# Allegro board heapode_carte_V2.brd
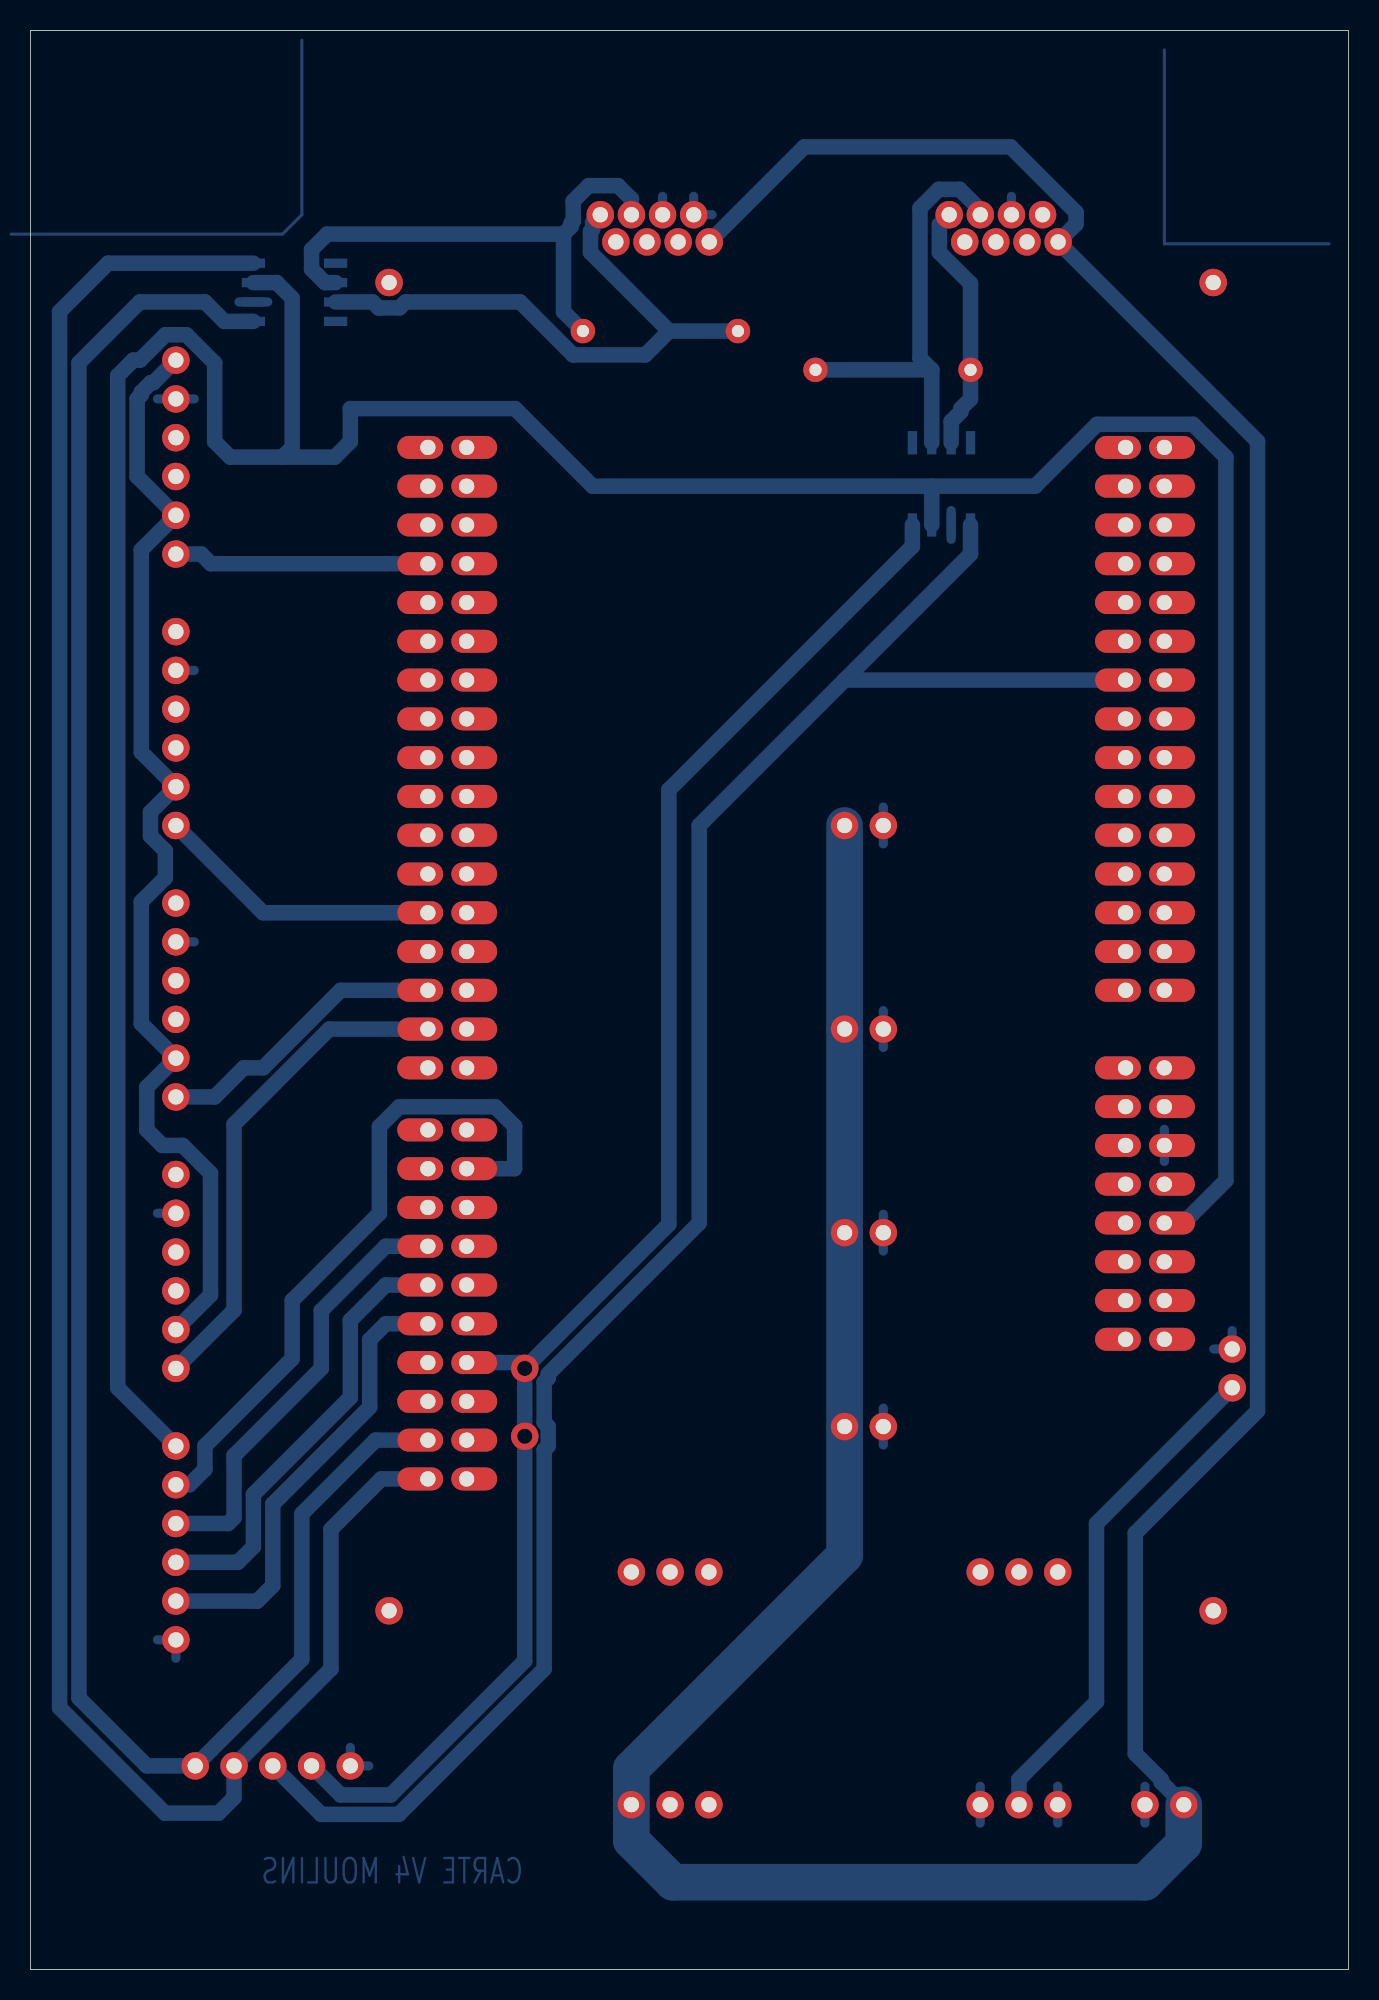
[diagram p0: board, top side]
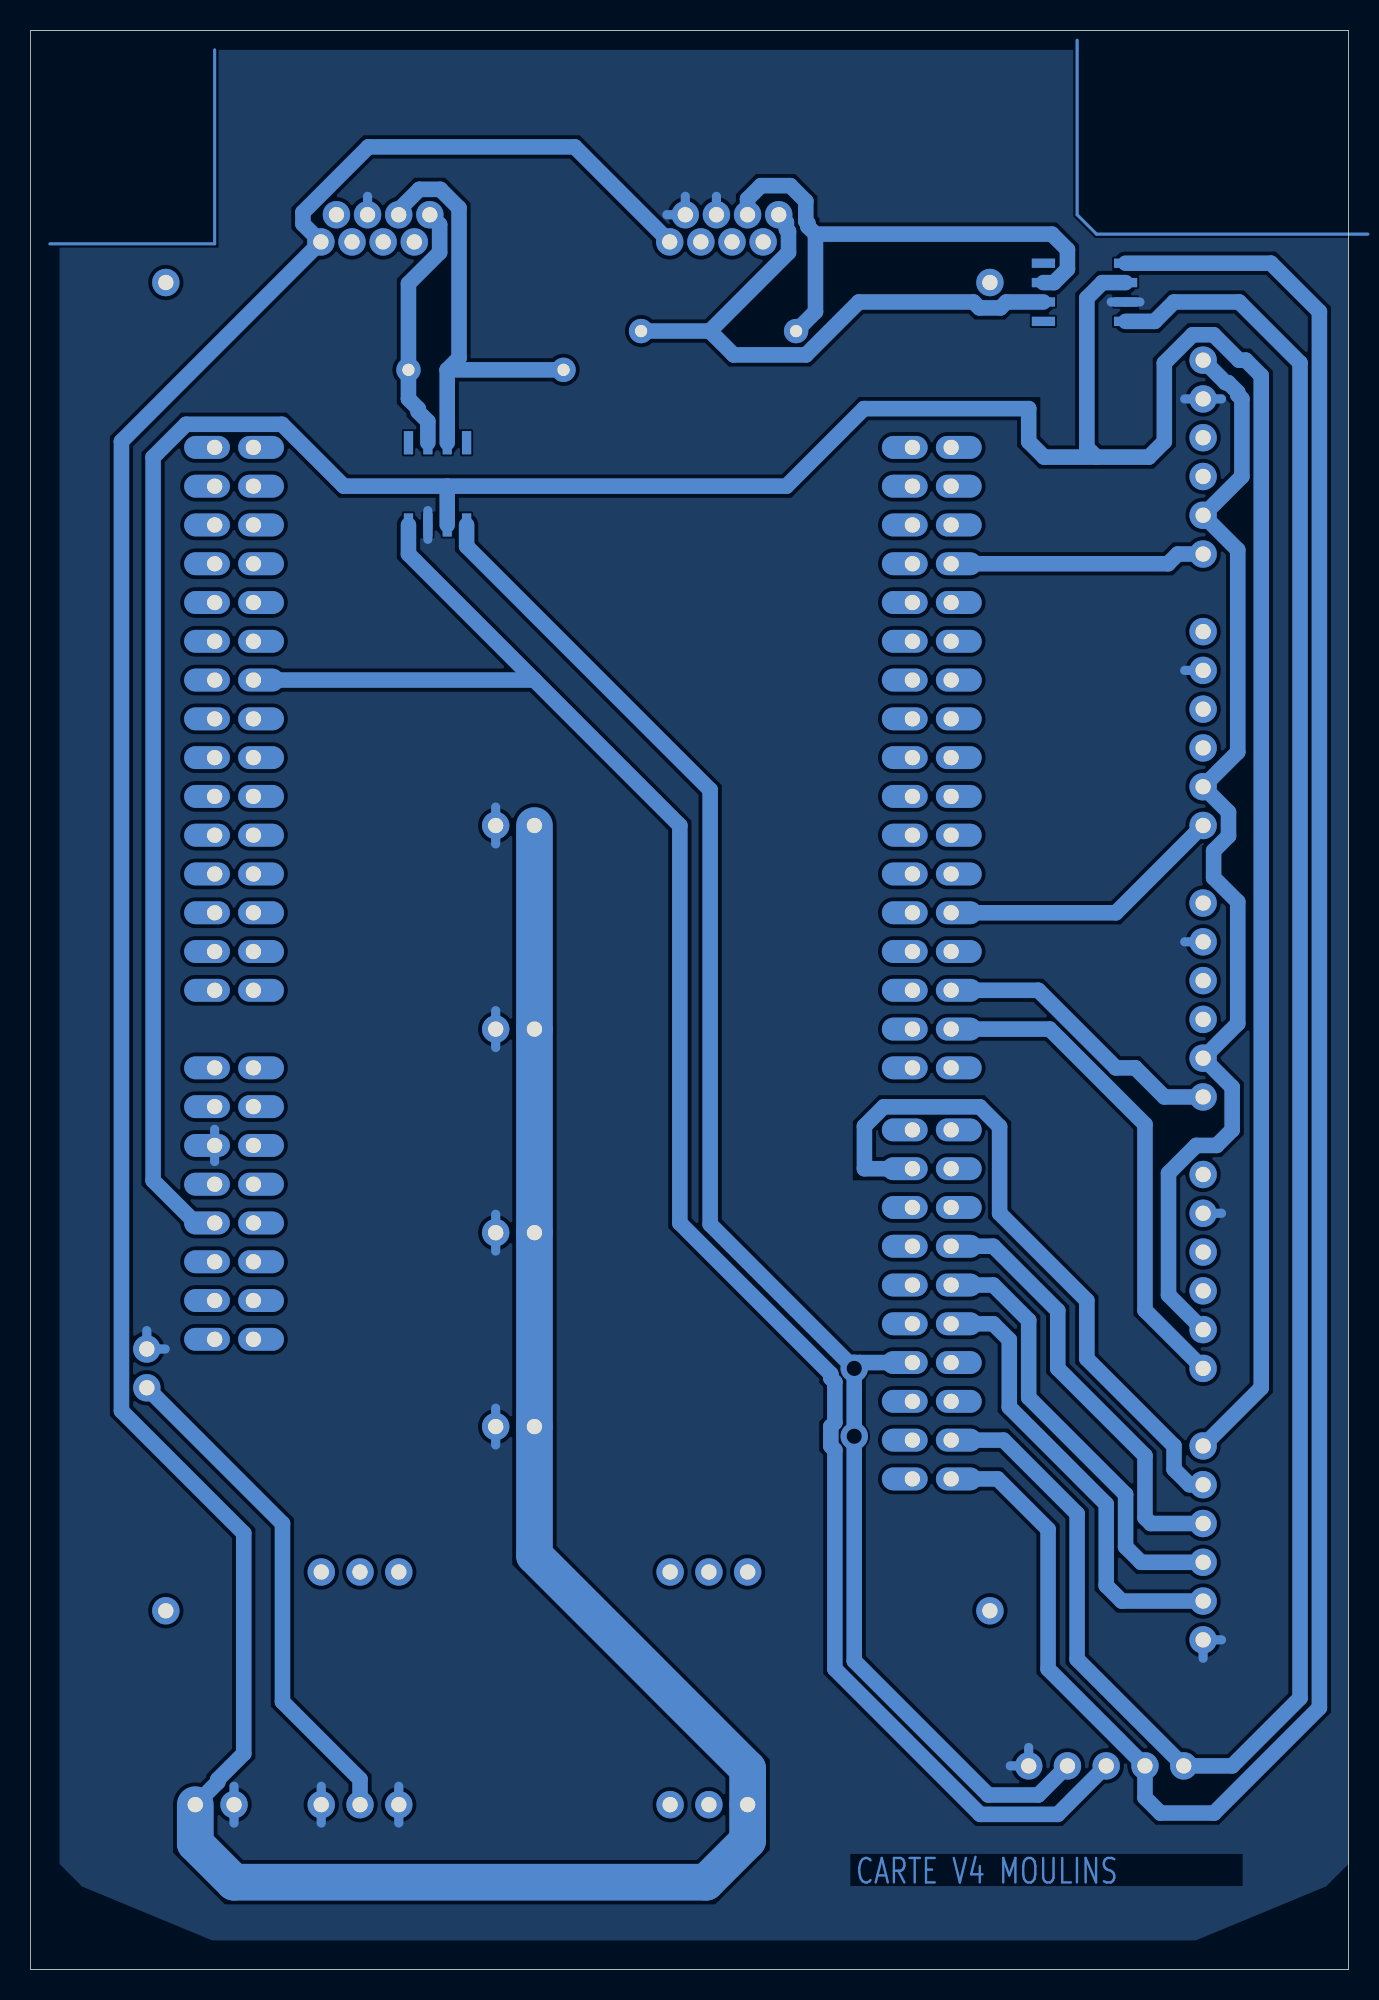
[diagram p1: board, bottom side, seen from below]

Outline 86.36 x 127 mm; copper layers: TOP, BOTTOM. Coordinates in mm from the lower left corner of the outline.
Outline path: 0,127 0,0 86.36,0 86.36,127 0,127

## Design rules (mm)
constraint set DEFAULT: min track width 1.016

## Placement (name value [footprint] x y rotation side)
J11  Sortie_1  [CONNECTEUR_2]  83.19 10.79 180 top
J12  Sortie_2  [CONNECTEUR_2]  45.72 35.56 0 top
J13  Sortie_3  [CONNECTEUR_2]  45.72 48.26 0 top
J14  Sortie_4  [CONNECTEUR_2]  45.72 74.93 0 top
J15  Entree_24V  [CONNECTEUR_2]  45.72 61.59 0 top
J17  Nappe_1  [CONNECTEUR_6]  9.53 34.29 90 top
J18  Nappe_2  [CONNECTEUR_6]  9.53 52.07 90 top
J19  Nappe_3  [CONNECTEUR_6]  9.53 69.85 90 top
J20  Nappe_4  [CONNECTEUR_6]  9.53 87.63 90 top
J23  Lect_Interm_RxTx  [CONNECTEUR_5]  26.04 13.34 180 top
J24  Potar  [CONNECTEUR_6]  9.53 16.51 90 top
J25  Alim_E5V  [CONNECTEUR_2]  78.74 48.26 270 top
R3  120  [RES_01]  36.2 107.31 0 top
R4  120  [RES_01]  51.44 104.78 0 top
U5  sn69hvd232d  [SN65HVD232D]  14.61 107.95 0 bottom
U6  sn69hvd232d  [SN65HVD232D]  61.59 94.61 90 bottom
U7  nucleo_144_shield  [NUCLEO_144_SHIELD]  74.3 99.69 180 top
U8  Conv_TEL_3-2411  [CONV_TRACO]  46.99 41.27 90 top
U9  RJ-45  [RJ45]  5.71 114.94 0 top
U10  RJ-45  [RJ45]  28.57 114.94 0 top
U11  Trou_Drivers  [TROU_DRIVERS]  23.5 23.5 90 top

## Library data of the parts
J11-J15 J25 = CON2
J17-J20 J24 = CON6
J23 = CON5
R3 R4 = R
U5 U6 = sn69hvd232d
U7 = nucleo_144_shield
U8 = Conv_TEL_3-2411
U9 U10 = RJ-45
U11 = Trou_Drivers

## Footprints (pads in the part's own frame, mm; a bottom-side part is the same pattern mirrored in y, then rotated)
CONNECTEUR_2
  round 1.8 hole 1: 1(7.62,0) 2(10.16,0)
CONNECTEUR_5
  round 1.8 hole 1: 1(5.08,0) 2(7.62,0) 3(10.16,0) 4(12.7,0) 5(15.24,0)
CONNECTEUR_6
  round 1.8 hole 1: 1(5.08,0) 2(7.62,0) 3(10.16,0) 4(12.7,0) 5(15.24,0) 6(17.78,0)
CONV_TRACO
  round 1.8 hole 1: 1(-30.48,7.62) 2(-30.48,5.08) 3(-30.48,2.54) 4(-15.24,7.62) 5(-15.24,5.08) 6(-15.24,2.54) 7(-30.48,-15.24) 8(-30.48,-17.78) 9(-30.48,-20.32) 10(-15.24,-15.24) 11(-15.24,-17.78) 12(-15.24,-20.32)
NUCLEO_144_SHIELD
  oval 3x1.5 hole 1: 1(0,58.42) 2(2.54,58.42) 3(0,55.88) 4(2.54,55.88) 5(0,53.34) 6(2.54,53.34) 7(0,50.8) 8(2.54,50.8) 9(0,48.26) 10(2.54,48.26) 11(0,45.72) 12(2.54,45.72) 13(0,43.18) 14(2.54,43.18) 15(0,40.64) 16(2.54,40.64) 17(0,35.56) 18(2.54,35.56) 19(0,33.02) 20(2.54,33.02) 21(0,30.48) 22(2.54,30.48) 23(0,27.94) 24(2.54,27.94) 25(0,25.4) 26(2.54,25.4) 27(0,22.86) 28(2.54,22.86) 29(0,20.32) 30(2.54,20.32) 31(0,17.78) 32(2.54,17.78) 33(0,15.24) 34(2.54,15.24) 35(0,12.7) 36(2.54,12.7) 37(0,10.16) 38(2.54,10.16) 39(0,7.62) 40(2.54,7.62) 41(0,5.08) 42(2.54,5.08) 43(0,2.54) 44(2.54,2.54) 45(0,0) 46(2.54,0) 47(45.72,67.564) 48(48.26,67.564) 49(45.72,65.024) 50(48.26,65.024) 51(45.72,62.484) 52(48.26,62.484) 53(45.72,59.944) 54(48.26,59.944) 55(45.72,57.404) 56(48.26,57.404) 57(45.72,54.864) 58(48.26,54.864) 59(45.72,52.324) 60(48.26,52.324) 61(45.72,49.784) 62(48.26,49.784) 63(45.72,47.244) 64(48.26,47.244) 65(45.72,44.704) 66(48.26,44.704) 67(45.72,40.64) 68(48.26,40.64) 69(45.72,38.1) 70(48.26,38.1) 71(45.72,35.56) 72(48.26,35.56) 73(45.72,33.02) 74(48.26,33.02) 75(45.72,30.48) 76(48.26,30.48) 77(45.72,27.94) 78(48.26,27.94) 79(45.72,25.4) 80(48.26,25.4) 81(45.72,22.86) 82(48.26,22.86) 83(45.72,20.32) 84(48.26,20.32) 85(45.72,17.78) 86(48.26,17.78) 87(45.72,15.24) 88(48.26,15.24) 89(45.72,12.7) 90(48.26,12.7) 91(45.72,10.16) 92(48.26,10.16) 93(45.72,7.62) 94(48.26,7.62) 95(45.72,5.08) 96(48.26,5.08) 97(45.72,2.54) 98(48.26,2.54) 99(45.72,0) 100(48.26,0)
RES_01
  round 1.6 hole 0.8: 1(0,0) 2(10.16,0)
RJ45
  round 1.8 hole 1: 1(31.62,0) 2(33.66,0) 3(35.7,0) 4(37.74,0) 5(32.64,-1.78) 6(34.68,-1.78) 7(36.72,-1.78) 8(38.76,-1.78)
SN65HVD232D
  rect 1.524x0.61 smd: 1(0,0) 2(0,-1.27) 3(0,-2.54) 4(0,-3.81) 5(5.385,-3.81) 6(5.385,-2.54) 7(5.385,-1.27) 8(5.385,0)
TROU_DRIVERS
  round 1.8 hole 1: 1(0,0) 2(87,0) 3(0,-54) 4(87,-54)

## Nets
24V_ALIM: J11.1 J12.1 J13.1 J14.1 J15.1 U8.1 U9.8(PIN_8) U10.8(PIN_8)
+3V3: J24.6 U5.3(VCC) U6.3(VCC) U7.7
+5V: U7.9
VIN_5V: J25.2 U8.8
0: J11.2 J12.2 J13.2 J14.2 J15.2 J17.5 J18.5 J19.5 J20.5 J23.1 J24.1 J25.1 U5.2 U6.2 U7.11 U8.7 U8.9 U9.3 U9.4 U10.3 U10.4
CAN1_H: R3.2 U5.7 U9.1
CAN1_L: R3.1 U5.6 U9.2
CAN1RX_PB8: J23.4 U5.4 U7.48
CAN1TX_PB9: J23.5 U5.1 U7.50
CAN2_H: R4.2 U6.7 U10.1
CAN2_L: R4.1 U6.6 U10.2
CAN2RX_PB12: J23.2 U6.4 U7.53
CAN2TX_PB6: U7.92
CAN2TX_PB13: J23.3 U6.1
CH1_PE9: J17.1 U7.70(PE9)
CH2_PE11: J18.1 U7.72
CH3_PE13: J19.1 U7.76
CH4_PE14: J20.1 U7.94
PA4: J24.5 U7.63
PA5: J24.2 U7.56
PA6: J24.3 U7.58
PA7: J24.4 U7.60
N37105: J17.2 J18.2 J19.2 J20.2 J20.6
N67760: U7.30

Pads without a net: J17 3 4 6; J18 3 4 6; J19 3 4 6; J20 3 4; U5 5 8; U6 5 8; U7 1 2 3 4 5 6 8 10 12 13 14 15 16 17 18 19 20 21 22 23 24 25 26 27 28 29 31 32 33 34 35 36 37 38 39 40 41 42 43 44 45 46 47 49 51 52 54 55 57 59 61 62 64 65 66 67 68 69 71 73 74 75 77 78 79 80 81 82 83 84 85 86 87 88 89 90 91 93 95 96 97 98 99 100; U8 2 3 4 5 6 10 11 12; U9 5 6 7; U10 5 6 7; U11 1 2 3 4

## Via types
v1: diameter 1.8, hole 1, TOP to BOTTOM, 2 vias

## Routing (per net, layer and track width the routed paths; a pad name or vN(x,y) marks a point on that pad's centre or on a via; arc(x,y) is an arc through that point)
24V_ALIM: length 256.4
  BOTTOM w1.016: J11.1 74.09,12.27 74.09,12.44 72.39,14.14 72.39,28.57 80.4,36.59 80.4,100.09 U10.8 68.51,114.33 68.51,115.09 64.22,119.38 50.7,119.38 44.48,113.16
  BOTTOM w2.4: J11.1 75.56,8.26 73.03,5.71 42.1,5.71 39.37,8.44 39.37,13.15 53.34,27.12 J12.1 J13.1 J15.1 J14.1
+3V3: length 227.7
  BOTTOM w1.016: 16.51,99.06 19.94,99.06 20.95,100.08 20.95,102.23 31.75,102.23 36.83,97.16 59.05,97.16 ; 16.51,99.06 13.08,99.06 12.06,100.08 12.06,105.22 10.21,107.07 8.84,107.07 7.17,105.41 6.73,105.41 5.71,104.39 5.71,38.1 9.53,34.29 ; 16.51,99.06 17.14,99.69 17.14,109.47 16.13,110.49 U5.3 ; 59.05,97.16 U6.3 ; 59.05,97.16 65.83,97.16 69.88,101.21 76.17,101.21 78.33,99.05 78.33,51.68 75.55,48.9 74.3,48.9
VIN_5V: length 33.1
  BOTTOM w1.016: J25.2 69.85,29.21 69.85,17.54 64.77,12.46 64.77,10.79
0: length 40.8
  BOTTOM w0.6: 74.3,55.03 74.3,52.92 ; 73.03,12 J11.2 73.03,9.59 ; 78.74,41.85 J25.1 77.53,40.64 ; 62.23,9.59 62.23,12 ; 20.95,14.54 J23.1 22.16,13.34 ; 55.88,49.47 J13.2 55.88,47.05 ; 13.66,109.22 U5.2 15.54,109.22 ; 60.33,95.56 U6.2 60.33,93.67 ; 10.73,102.87 8.32,102.87 ; 9.53,20.38 J24.1 8.32,21.59 ; 67.31,9.59 67.31,12 ; U9.3 41.41,116.14 ; 55.88,34.35 J12.2 55.88,36.77 ; 9.53,85.09 10.73,85.09 ; 44.66,114.94 U9.4 43.45,116.14 ; 55.88,73.72 J14.2 55.88,76.14 ; 55.88,60.39 J15.2 55.88,62.8 ; U10.3 64.28,116.14 ; 8.32,49.53 9.53,49.53 ; 9.53,67.31 10.73,67.31
CAN1_H: length 38.8
  BOTTOM w1.016: 41.84,107.31 36.69,112.47 36.69,113.84 36.83,113.98 36.83,114.43 U9.1 ; 41.84,107.31 40.28,105.75 35.55,105.75 32.08,109.22 24.57,109.22 24.18,108.83 22.81,108.83 22.42,109.22 U5.7 ; 41.84,107.31 R3.2
CAN1_L: length 35.1
  BOTTOM w1.016: 34.92,113.67 34.92,108.58 R3.1 ; 34.92,113.67 35.42,114.16 35.42,114.37 35.56,114.51 35.56,115.82 36.58,116.84 38.5,116.84 39.38,115.96 U9.2 ; 34.92,113.67 19.43,113.67 18.41,112.65 18.41,111.37 19.3,110.49 U5.6
CAN1RX_PB8: length 148.1
  BOTTOM w1.016: 26.04,32.13 22.99,32.13 19.68,28.83 19.68,19.68 J23.4 13.34,11.26 12.32,10.24 8.81,10.24 1.91,17.14 1.91,108.58 5.08,111.76 U5.4
CAN1TX_PB9: length 140.2
  BOTTOM w1.016: U5.1 12.7,107.95 11.43,109.22 7.16,109.22 3.17,105.23 3.17,17.78 7.62,13.34 J23.5 17.78,20.32 17.78,29.84 22.61,34.67 26.04,34.67
CAN2_H: length 16.6
  BOTTOM w1.016: U10.1 59.55,114.29 59.55,112.47 61.59,110.42 R4.2 61.59,102.87 60.96,102.23 60.96,102.03 60.33,101.4 U6.7
CAN2_L: length 28.6
  BOTTOM w1.016: R4.1 59.05,104.78 ; 59.05,104.78 U6.6 ; 59.05,104.78 58.28,105.55 58.28,115.37 59.51,116.6 60.88,116.6 62.23,115.25 U10.2
CAN2RX_PB12: length 107.5
  BOTTOM w1.016: 32,39.75 32.77,39.75 41.83,48.81 41.83,77.26 57.78,93.22 U6.4 ; 32,39.75 v1(32.38,39.37) v1(32.38,34.92) 32.38,20.21 23.6,11.43 20.32,11.43 J23.2 ; 32,39.75 28.57,39.75
CAN2TX_PB13: length 128.2
  BOTTOM w1.016: J23.3 19.05,10.16 24.13,10.16 33.66,19.68 33.66,34.02 33.92,34.29 33.92,35.56 33.66,35.83 33.66,38.47 33.92,38.73 33.92,39 43.81,48.9 43.81,74.93 53.34,84.45 ; 53.34,84.45 71.75,84.45 ; 53.34,84.45 61.59,92.71 U6.1
CH1_PE9: length 32.8
  BOTTOM w1.016: J17.1 13.34,43.18 13.34,55.35 19.58,61.59 26.04,61.59
CH2_PE11: length 19.4
  BOTTOM w1.016: J18.1 12.06,57.15 13.97,59.05 15.24,59.05 20.32,64.14 26.04,64.14
CH3_PE13: length 18.9
  BOTTOM w1.016: 26.04,69.22 15.24,69.22 J19.1
CH4_PE14: length 16.8
  BOTTOM w1.016: J20.1 11.19,92.71 11.82,92.08 26.04,92.08
PA4: length 45.3
  BOTTOM w1.016: 28.57,52.45 31.72,52.45 31.72,55.24 30.45,56.5 24.16,56.5 22.86,55.2 22.86,49.53 17.14,43.81 17.14,40.01 11.43,34.29 11.43,32.77 10.41,31.75 9.53,31.75
PA5: length 29.7
  BOTTOM w1.016: J24.2 14.86,24.13 15.88,25.15 15.88,30.48 22.23,36.83 22.23,41.24 23.27,42.29 26.04,42.29
PA6: length 29
  BOTTOM w1.016: J24.3 13.59,26.67 14.61,27.69 14.61,31.11 20.95,37.47 20.95,42.51 23.27,44.83 26.04,44.83
PA7: length 28.6
  BOTTOM w1.016: J24.4 12.95,29.21 13.34,29.59 13.34,33.66 19.05,39.37 19.05,43.15 23.27,47.37 26.04,47.37
N37105: length 74.5
  BOTTOM w1.016: 9.53,105.41 8.05,103.93 7.88,103.93 7.26,103.31 7.26,103.14 6.99,102.87 6.99,97.79 J20.2 7.26,92.98 7.26,79.74 J19.2 7.86,75.81 7.86,74.24 8.84,73.27 8.84,71.51 7.26,69.93 7.26,61.96 J18.2 7.62,57.78 7.62,54.99 8.64,53.98 9.97,53.98 11.79,52.15 11.79,44.18 J17.2

## Copper pours and planes (outline as drawn; the poured copper is in the pictures)
0 on BOTTOM: 0,120.73 0,6.91 1.46,5.44 10,1.91 74.45,1.91 82.99,5.44 84.45,6.91 84.45,120.73 82.99,122.19 74.45,125.73 10,125.73 1.46,122.19

## Text on the board
BOTTOM: CARTE V4 MOULINS
